# EAGLE board TubeBoard2 (EAGLE 9.2.2)

Size 155 x 114 mm. Coordinates in mm from the lower left corner, seen from the top.
Outline: 0,0 120,0 155,35 155,114 0,114 0,0
Copper layers (1*16): Top 0.035mm / dielectric 1.5mm / Bottom 0.035mm
Design rules "default": minimum track width 6mil, minimum drill 0.35mm, track to track 6mil, track to pad 6mil, pad to pad 6mil, via to via 6mil, smd to smd 6mil, copper to edge 40mil, drill to drill 6mil, minimum pad ring 10mil, minimum via ring 8mil, stop-mask expansion 4mil, vias tented up to drill 0mil, thermal gap 10mil
Holes 3.2 mm at 5,5 5,109 150,109 135,24

## Footprints (pad centres in the part's own frame; a part is rotated, then mirrored left to right if it is on the bottom)
AT-MT9P = drill 1.016 long: 1 8.84,31; 2 11.38,31; 3 13.92,31; 4 16.46,31; 5 19,31; 6 21.54,31; 7 24.08,31; 8 26.62,31; 9 29.16,31; 10 8.84,2.9; 11 11.38,2.9; 12 13.92,2.9; 13 16.46,2.9; 14 19,2.9; 15 21.54,2.9; 16 24.08,2.9; 17 26.62,2.9; 18 29.16,2.9

## Placement (x,y rotation side)
E$1  [AT-MT9P]  42.92,70 90 top
E$2  [AT-MT9P]  129,7 90 top

## Library data of the parts
E$1 E$2 = VacuumTube